# Allegro board ETHIIc.brd
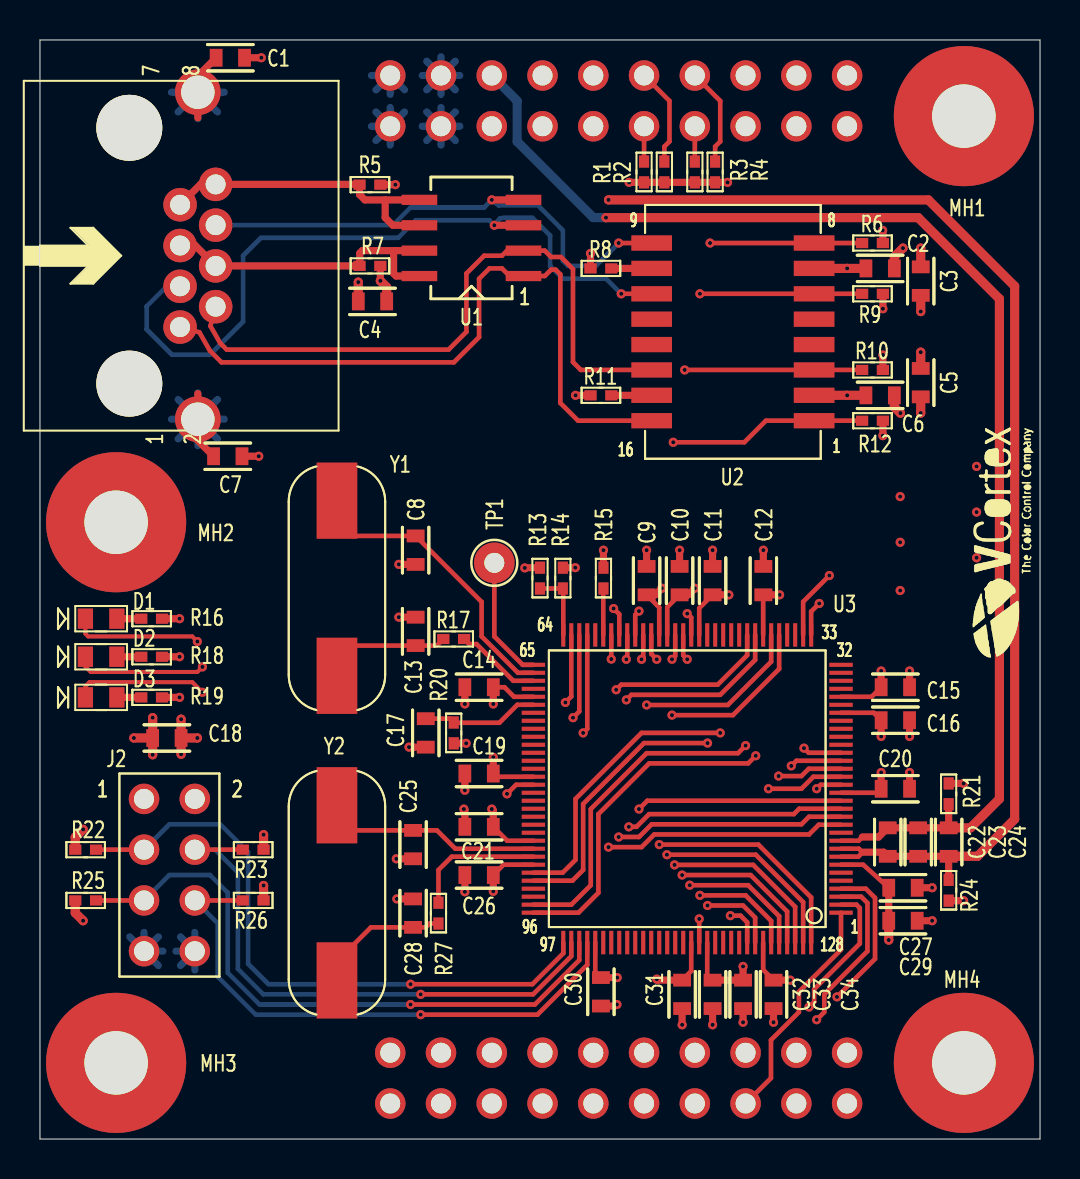
[diagram p0: board, top side]
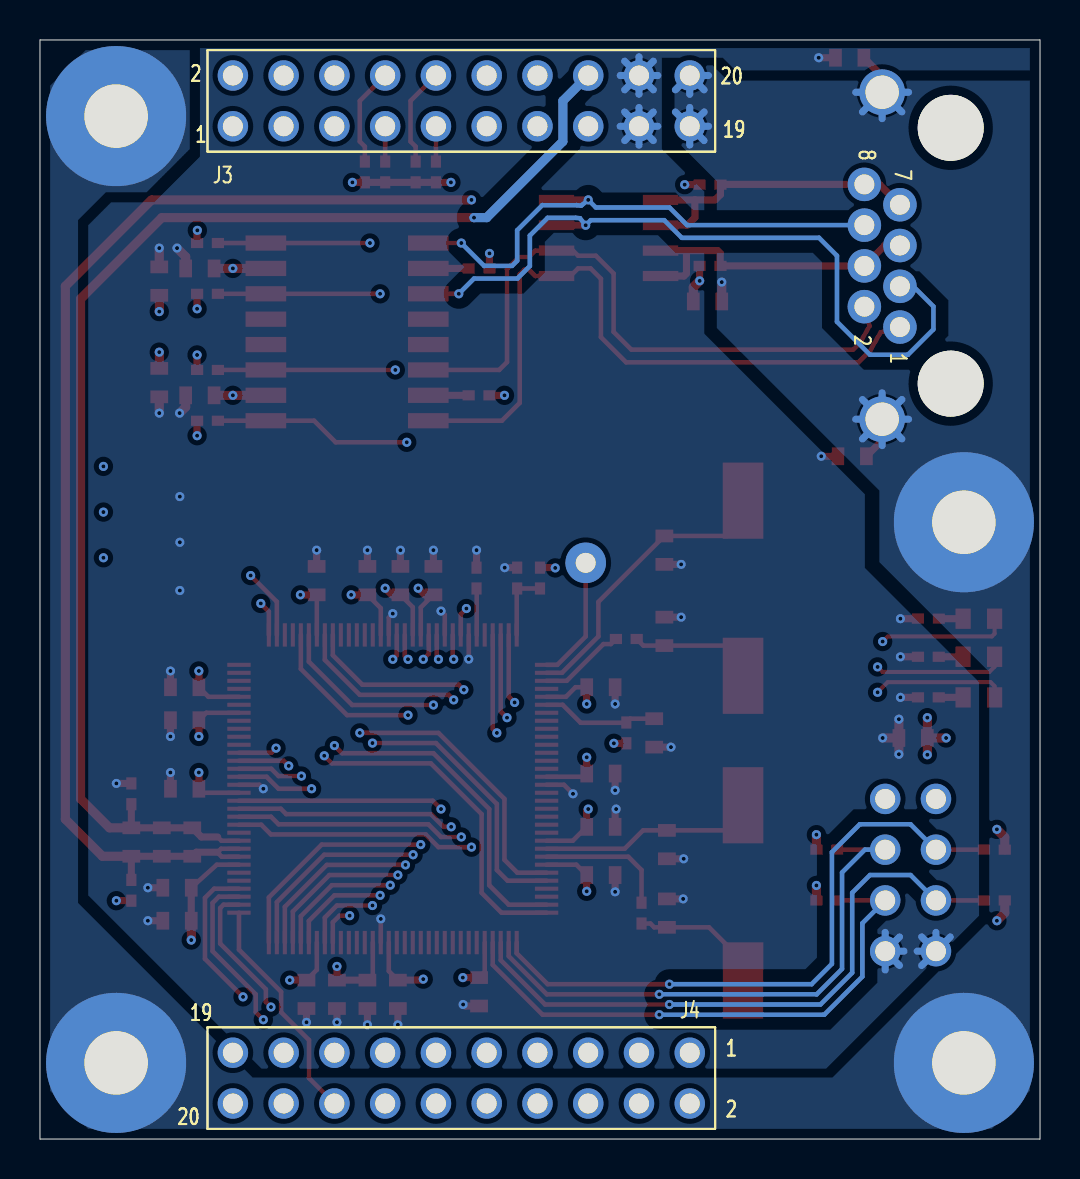
[diagram p1: board, bottom side, seen from below]

Outline 50.04 x 54.99 mm; copper layers: TOP, SIG1, SIG2, BOTTOM. Coordinates in mm from the lower left corner of the outline.
Outline path: 0,54.99 0,0 50.04,0 50.04,54.99 0,54.99

## Design rules (mm)
net group 100R_DIFF: nets RX+ RX- TX+ TX-

## Placement (name value [footprint] x y rotation side)
C1  0.1uF  [0603]  9.53 54.1 180 top
C2  0.1uF  [0603]  42.04 43.56 180 top
C3  0.1uF  [0603]  44.07 42.93 270 top
C4  1000pF  [0603]  16.64 41.91 180 top
C5  0.1uF  [0603]  44.07 37.85 90 top
C6  0.1uF  [0603]  42.04 37.21 180 top
C7  4.7uF  [0603]  9.4 34.16 180 top
C8  12pF  [0603]  18.8 29.46 90 top
C9  0.1uF  [0603]  30.35 27.94 270 top
C10  0.1uF  [0603]  32 27.94 270 top
C11  0.1uF  [0603]  33.66 27.94 270 top
C12  0.1uF  [0603]  36.2 27.94 270 top
C13  12pF  [0603]  18.8 25.4 270 top
C14  0.1uF  [0603]  21.97 22.61 0 top
C15  4.7uF  [0603]  42.8 22.61 180 top
C16  0.1uF  [0603]  42.8 20.95 180 top
C17  4.7uF  [0603]  19.3 20.32 90 top
C18  0.1uF  [0603]  6.35 20.07 180 top
C19  0.1uF  [0603]  21.97 18.29 0 top
C20  0.1uF  [0603]  42.8 17.53 180 top
C21  0.1uF  [0603]  21.97 15.62 0 top
C22  4.7uF  [0603]  42.42 14.86 270 top
C23  0.1uF  [0603]  43.94 14.86 270 top
C24  0.1uF  [0603]  45.47 14.86 270 top
C25  12pF  [0603]  18.67 14.73 90 top
C26  0.1uF  [0603]  21.97 13.21 0 top
C27  0.1uF  [0603]  43.18 12.57 180 top
C28  12pF  [0603]  18.67 11.3 270 top
C29  0.1uF  [0603]  43.18 10.92 180 top
C30  0.1uF  [0603]  28.07 7.37 90 top
C31  0.1uF  [0603]  32.13 7.24 90 top
C32  0.1uF  [0603]  33.66 7.24 90 top
C33  4.7uF  [0603]  35.18 7.24 90 top
C34  0.1uF  [0603]  36.7 7.24 90 top
D1  598-8070-107F  [LED0603]  3.06 26.04 0 top
D2  598-8070-107F  [LED0603]  3.06 24.13 0 top
D3  598-8070-107F  [LED0603]  3.06 22.1 0 top
J1  ETH  [1-406541-5]  7.9 44.2 270 top
J2  CON8  [HEADER_TH_2X4]  6.48 13.21 0 top
J3  CON20  [HEADER_TH_2X10]  28.96 51.94 90 bottom
J4  CON20  [HEADER_TH_2X10]  28.96 3.05 270 bottom
MH1  Hole  [PMH276D126]  46.23 51.18 0 top
MH2  Hole  [PMH276D126]  3.81 30.86 0 top
MH3  Hole  [PMH276D126]  3.81 3.81 0 top
MH4  Hole  [PMH276D126]  46.23 3.81 0 top
NOREF  -  []  0 54.99 0 top
NOREF#2  -  []  37.85 1.78 90 top
NOREF#3  -  []  17.53 50.67 90 top
NOREF#4  -  []  17.53 53.21 0 top
NOREF#5  -  []  52.43 23.59 90 top
NOREF#6  -  []  0 0 0 top
NOREF#7  -  []  0 0 0 top
NOREF#8  -  []  0 0 90 top
NOREF#9  -  []  7.9 36.02 90 top
NOREF#10  -  []  4.47 37.8 90 top
NOREF#11  -  []  46.23 51.18 90 top
NOREF#12  -  []  40.39 50.67 0 top
NOREF#13  -  []  50.04 0 90 top
NOREF#14  -  []  40.39 4.32 90 top
NOREF#15  -  []  7.9 36.02 90 top
NOREF#16  -  []  4.47 37.8 90 top
NOREF#17  -  []  52.43 23.59 90 top
NOREF#18  -  []  -111.89 -133.35 0 top
NOREF#19  -  []  0 0 0 top
NOREF#20  -  []  0 0 90 top
NOREF#21  -  []  7.01 42.67 0 top
NOREF#22  -  []  0 0 0 top
NOREF#23  -  []  0 0 90 top
NOREF#24  -  []  17.53 1.78 0 top
NOREF#25  -  []  50.04 0 90 top
NOREF#26  -  []  207.01 8 0 top
NOREF#27  -  []  7.01 46.75 90 top
R1  10k  [0402]  30.23 48.39 90 top
R2  10k  [0402]  31.24 48.39 90 top
R3  10k  [0402]  32.77 48.39 90 top
R4  10k  [0402]  33.78 48.39 90 top
R5  75R  [0402]  16.51 47.75 180 top
R6  49.9R  [0402]  41.66 44.83 0 top
R7  75R  [0402]  16.51 43.69 180 top
R8  75R  [0402]  28.07 43.56 0 top
R9  49.9R  [0402]  41.66 42.29 0 top
R10  49.9R  [0402]  41.66 38.48 0 top
R11  75R  [0402]  28.07 37.21 0 top
R12  49.9R  [0402]  41.66 35.94 0 top
R13  10k  [0402]  25.02 28.07 270 top
R14  10k  [0402]  26.16 28.07 90 top
R15  4.87K  [0402]  28.19 28.07 90 top
R16  75R  [0402]  5.59 26.04 0 top
R17  2k  [0402]  20.7 25.02 0 top
R18  75R  [0402]  5.59 24.13 0 top
R19  75R  [0402]  5.59 22.1 0 top
R20  10k  [0402]  20.7 20.32 90 top
R21  10k  [0402]  45.47 17.27 90 top
R22  10k  [0402]  2.29 14.48 0 top
R23  10k  [0402]  10.67 14.48 180 top
R24  10k  [0402]  45.47 12.45 270 top
R25  10k  [0402]  2.29 11.94 0 top
R26  10k  [0402]  10.67 11.94 180 top
R27  2k  [0402]  19.94 11.3 90 top
TP1  TEST POINT  [KEYSTONE-5000]  22.73 28.83 270 top
U1  SLVU2.8-4A1  [SOIC-8]  21.59 45.09 90 top
U2  -  [HX1198FNL]  34.67 40.39 180 top
U3  TM4C1294NCPDTI  [TQFP-128]  32.38 17.53 90 top
Y1  ATS160SM-1  [ATS]  14.86 27.56 270 top
Y2  ATS250SM-1  [ATS]  14.86 12.32 270 top

## Library data of the parts
C1-C6 C8-C14 C16 C18-C21 C23-C32 C34 = C
C7 C15 C17 C22 C33 = C_1
D1-D3 = d_5
J1 = CON8_1
J2 = CON8_2
J3 J4 = CON20_0
MH1-MH4 = FIDUCIAL_1
R1-R27 = R
TP1 = TEST POINT_2
U1 = SLVU2.8-4A1
U2 = HX1198FNL
U3 = TM4C1294NCPDTI
Y1 Y2 = ATS250BSM-1

## Footprints (pads in the part's own frame, mm; a bottom-side part is the same pattern mirrored in y, then rotated)
1-406541-5
  round 3.299 hole 3.3 unplated: (-6.4,-3.43) (6.4,-3.43)
  round 1.676 hole 1: 1(3.57,-0.89) 2(2.55,0.89) 3(1.53,-0.89) 4(0.51,0.89) 5(-0.51,-0.89) 6(-1.53,0.89) 7(-2.55,-0.89) 8(-3.57,0.89)
  round 2.286 hole 1.67: 9(-8.18,0) 10(8.18,0)
0402
  rect 0.61x0.508 smd: 1(-0.521,0) 2(0.521,0)
0603
  rect 0.635x0.889 smd: 1(-0.711,0) 2(0.711,0)
ATS
  rect 3.81x2.032 smd: 1(-4.381,0) 2(4.381,0)
HEADER_TH_2X4
  round 1.524 hole 1: 1(-1.27,3.81) 2(1.27,3.81) 3(-1.27,1.27) 4(1.27,1.27) 5(-1.27,-1.27) 6(1.27,-1.27) 7(-1.27,-3.81) 8(1.27,-3.81)
HEADER_TH_2X10
  round 1.524 hole 1: 1(-1.27,11.43) 2(1.27,11.43) 3(-1.27,8.89) 4(1.27,8.89) 5(-1.27,6.35) 6(1.27,6.35) 7(-1.27,3.81) 8(1.27,3.81) 9(-1.27,1.27) 10(1.27,1.27) 11(-1.27,-1.27) 12(1.27,-1.27) 13(-1.27,-3.81) 14(1.27,-3.81) 15(-1.27,-6.35) 16(1.27,-6.35) 17(-1.27,-8.89) 18(1.27,-8.89) 19(-1.27,-11.43) 20(1.27,-11.43)
HX1198FNL
  rect 2.032x0.762 smd: 1(-4.064,4.445) 2(-4.064,3.175) 3(-4.064,1.905) 4(-4.064,0.635) 5(-4.064,-0.635) 6(-4.064,-1.905) 7(-4.064,-3.175) 8(-4.064,-4.445) 9(4.064,-4.445) 10(4.064,-3.175) 11(4.064,-1.905) 12(4.064,-0.635) 13(4.064,0.635) 14(4.064,1.905) 15(4.064,3.175) 16(4.064,4.445)
KEYSTONE-5000
  round 2.032 hole 1: 1(0,0)
LED0603
  rect 0.762x1.016 smd: 1(-0.787,0) 2(0.787,0)
PMH276D126
  round 7.01 hole 3.175: 1(0,0)
SOIC-8
  rect 0.508x1.778 smd: 1(-1.905,-2.603) 2(-0.635,-2.603) 3(0.635,-2.603) 4(1.905,-2.603) 5(1.905,2.603) 6(0.635,2.603) 7(-0.635,2.603) 8(-1.905,2.603)
TQFP-128
  rect 0.203x1.168 smd: 1(-6.201,-7.696) 2(-5.801,-7.696) 3(-5.401,-7.696) 4(-5.001,-7.696) 5(-4.601,-7.696) 6(-4.201,-7.696) 7(-3.801,-7.696) 8(-3.401,-7.696) 9(-3.001,-7.696) 10(-2.6,-7.696) 11(-2.2,-7.696) 12(-1.8,-7.696) 13(-1.4,-7.696) 14(-1,-7.696) 15(-0.6,-7.696) 16(-0.2,-7.696) 17(0.2,-7.696) 18(0.6,-7.696) 19(1,-7.696) 20(1.4,-7.696) 21(1.8,-7.696) 22(2.2,-7.696) 23(2.6,-7.696) 24(3.001,-7.696) 25(3.401,-7.696) 26(3.801,-7.696) 27(4.201,-7.696) 28(4.601,-7.696) 29(5.001,-7.696) 30(5.401,-7.696) 31(5.801,-7.696) 32(6.201,-7.696) 65(6.201,7.696) 66(5.801,7.696) 67(5.401,7.696) 68(5.001,7.696) 69(4.601,7.696) 70(4.201,7.696) 71(3.801,7.696) 72(3.401,7.696) 73(3.001,7.696) 74(2.6,7.696) 75(2.2,7.696) 76(1.8,7.696) 77(1.4,7.696) 78(1,7.696) 79(0.6,7.696) 80(0.2,7.696) 81(-0.2,7.696) 82(-0.6,7.696) 83(-1,7.696) 84(-1.4,7.696) 85(-1.8,7.696) 86(-2.2,7.696) 87(-2.6,7.696) 88(-3.001,7.696) 89(-3.401,7.696) 90(-3.801,7.696) 91(-4.201,7.696) 92(-4.601,7.696) 93(-5.001,7.696) 94(-5.401,7.696) 95(-5.801,7.696) 96(-6.201,7.696)
  rect 1.168x0.203 smd: 33(7.696,-6.201) 34(7.696,-5.801) 35(7.696,-5.401) 36(7.696,-5.001) 37(7.696,-4.601) 38(7.696,-4.201) 39(7.696,-3.801) 40(7.696,-3.401) 41(7.696,-3.001) 42(7.696,-2.6) 43(7.696,-2.2) 44(7.696,-1.8) 45(7.696,-1.4) 46(7.696,-1) 47(7.696,-0.6) 48(7.696,-0.2) 49(7.696,0.2) 50(7.696,0.6) 51(7.696,1) 52(7.696,1.4) 53(7.696,1.8) 54(7.696,2.2) 55(7.696,2.6) 56(7.696,3.001) 57(7.696,3.401) 58(7.696,3.801) 59(7.696,4.201) 60(7.696,4.601) 61(7.696,5.001) 62(7.696,5.401) 63(7.696,5.801) 64(7.696,6.201) 97(-7.696,6.201) 98(-7.696,5.801) 99(-7.696,5.401) 100(-7.696,5.001) 101(-7.696,4.601) 102(-7.696,4.201) 103(-7.696,3.801) 104(-7.696,3.401) 105(-7.696,3.001) 106(-7.696,2.6) 107(-7.696,2.2) 108(-7.696,1.8) 109(-7.696,1.4) 110(-7.696,1) 111(-7.696,0.6) 112(-7.696,0.2) 113(-7.696,-0.2) 114(-7.696,-0.6) 115(-7.696,-1) 116(-7.696,-1.4) 117(-7.696,-1.8) 118(-7.696,-2.2) 119(-7.696,-2.6) 120(-7.696,-3.001) 121(-7.696,-3.401) 122(-7.696,-3.801) 123(-7.696,-4.201) 124(-7.696,-4.601) 125(-7.696,-5.001) 126(-7.696,-5.401) 127(-7.696,-5.801) 128(-7.696,-6.201)

## Nets
3.3V: C2.2 C3.2 C5.2 C6.2 C9.2 C10.2 C11.2 C12.2 C14.2 C15.2 C16.2 C18.2 C19.2 C20.2 C26.2 C27.2 C29.2 C30.2 C31.2 C34.2 J2.1 J2.2 J3.1 J3.2 R1.1 R2.1 R3.1 R4.1 R6.2 R9.2 R10.2 R12.2 R13.1 R20.1 R22.1 R23.1 R24.2 R25.1 R26.1 U2.2 U2.7 U3.7(VDD1) U3.16(VDD2) U3.26(VDD3) U3.28(VDD4) U3.39(VDD5) U3.47(VDD6) U3.51(VDD7) U3.52(VDD8) U3.69(VDD9) U3.79(VDD10) U3.90(VDD11) U3.101(VDD12) U3.113(VDD13) U3.122(VDD14)
3.3VA: C22.2 C23.2 C24.2 J3.15 R24.1 U3.8(VDDA) U3.9(VREFA+)
3.3VB: U3.68(VBAT)
GND: C1.1 C2.1 C3.1 C5.1 C6.1 C7.1 C8.1 C9.1 C10.1 C11.1 C12.1 C13.1 C14.1 C15.1 C16.1 C17.1 C18.1 C19.1 C20.1 C21.1 C25.1 C26.1 C27.1 C28.1 C29.1 C30.1 C31.1 C32.1 C33.1 C34.1 J2.7 J2.8 J3.17 J3.18 R14.2 R15.2 R16.2 R18.2 R19.2 R21.2 U3.17(GND1) U3.48(GND2) U3.55(GND3) U3.58(GND4) U3.80(GND5) U3.114(GND6)
GND_EARTH: C1.2 C4.2 C7.2 J1.9(CHASSIS2) J1.10(CHASSIS1) J3.19 J3.20 MH1.1 MH2.1 MH3.1 MH4.1
GNDA: C22.1 C23.1 C24.1 J3.16 R21.1 U3.10(GNDA)
VDDC: C21.2 C32.2 C33.2 U3.87(VDDC1) U3.115(VDDC2)
AIN0: J4.1 U3.12(PE3/AIN0/U1DTR)
AIN1: J4.2 U3.13(PE2/AIN1/U1DCD)
AIN2: J4.3 U3.14(PE1/AIN2/U1DSR)
AIN3: J4.4 U3.15(PE0/AIN3/U1RTS)
AIN4: J4.5 U3.128(PD7/AIN4/NMI/SSI2XDAT2/T4CCP1/U)
AIN5: J4.6 U3.127(PD6/AIN5/SSI2XDAT3/T4CCP0/U2RTS)
AIN6: J4.7 U3.126(PD5/AIN6/SSI1XDAT3/T3CCP1/U2TX)
AIN7: J4.8 U3.125(PD4/AIN7/SSI1XDAT2/T3CCO0/U2RX)
AIN8: J4.9 U3.124(PE5/AIN8/SSI1XDAT1)
AIN9: J4.10 U3.123(PE4/AIN9/SSI1XDAT0/U1RI)
AIN10: J4.11 U3.121(PB4/AIN10/I2C5SCL/SSI1FSS/U0CTS)
AIN11: J4.12 U3.120(PB5/AIN11/I2C5SDA/SSI1CLK/U0RTS)
AIN12: J4.13 U3.4(PD3/AIN12/I2C8SDA/SSI2CLK/T1CCP)
AIN13: J4.14 U3.3(PD2/AIN13/C2O/I2C8SCL/SSI2SCL/T)
AIN14: J4.15 U3.2(PD1/AIN14/C1O/I2C7SDA/SSI2XDAT0)
AIN15: J4.16 U3.1(PD0/AIN15/C0O/I2C7SCL/SSI2XDAT1)
AIN16: J4.17 U3.18(PK0/AIN16/EPI0S0/U4RX)
AIN17: J4.18 U3.19(PK1/AIN17/EPIOS1/U4TX)
AIN18: J4.19 U3.20(PK2/AIN18/EPI0S2/U4RTS)
AIN19: J4.20 U3.21(PK3/AIN19/EPI0S3/U4CTS)
CAN0RX_UART0RX: J3.3 U3.33(PA0/CAN0RX/I2C9SCL/T0CCP0/U0RX)
CAN0TX_UART0TX: J3.4 U3.34(PA1/CAN0TX/I2C9SDA/T0CCP1/U0TX)
CAN1RX_UART1RX: J3.5 U3.95(PB0/CAN1RX/I2C5SCL/T4CCP0/U1RX/)
CAN1TX_UART1TX: J3.6 U3.96(PB1/CAN1TX/I2C5SDA/T4CCP1/U1TX/)
EN0RXIN: R6.1 U2.8 U3.53(EN0RXIN)
EN0RXIP: R9.1 U2.6 U3.54(EN0RXIP)
EN0TXON: R10.1 U2.3 U3.56(EN0TXON)
EN0TXOP: R12.1 U2.1 U3.57(EN0TXOP)
I2C0SCL: J3.8 R4.2 U3.91(PB2/EPI0S27/I2C0SCL/T5CCP0)
I2C0SDA: J3.7 R3.2 U3.92(PB3/EPI0S28/I2C0SDA/T5CCP1)
I2C1SCL: J3.10 R2.2 U3.49(PG0/EN0PPS/EPI0S11/I2C1SCL/M0PW)
I2C1SDA: J3.9 R1.2 U3.50(PG1/EPI0S10/I2C1SDA0/M0PWM5)
RX+: J1.3(RX+) U1.3 U2.11
RX-: J1.6(RX-) U1.4 U2.9
TCK: J2.6 R26.2 U3.100(PC0/SWCLK/TCK)
TDI: J2.4 R23.2 U3.98(PC2/TDI)
TDO: J2.3 R22.2 U3.97(PC3/SWO/TDO)
TERM1A: J1.4(TERM1A) J1.5(TERM1B) R7.2 U1.7 U1.8
TERM2A: J1.7(TERM2A) J1.8(TERM2B) R5.2 U1.5 U1.6
TMS: J2.5 R25.2 U3.99(PC1/SWDIO/TMS)
TX+: J1.1(TX+) U1.1 U2.16
TX-: J1.2(TX-) U1.2 U2.14
UART2RX: J3.13 U3.40(PA6/EPI0S8/I2C6SCL/SSI0XDAT2/T3)
UART2TX: J3.14 U3.41(PA7/EPI0S9/I2C6SDA/SSI0XDAT3/T3)
UART3RX: J3.11 U3.37(PA4/I2C7SCL/SSI0XDAT0/T2CCP0/U3)
UART3TX: J3.12 U3.38(PA5/I2C7SDA/SSI0XDAT1/T2CCP1/U3)
N129505: C17.2 R20.2 U3.70(R\S\T\)
N130186: R27.2 U3.89(OSC1)
N130446: C28.2 R27.1 Y2.2
N132048: C8.2 U3.66(XOSC0) Y1.1
N132071: R17.2 U3.67(XOSC1)
N132102: C25.2 U3.88(OSC0) Y2.1
N133314: C13.2 R17.1 Y1.2
N134047: TP1.1 U3.65(H\I\B\)
N134520: R13.2 R14.1 U3.64(W\A\K\E\)
N138408: R8.2 U2.10
N138412: R11.2 U2.15
N138416: C4.1 R5.1 R7.1 R8.1 R11.1
N141220: R15.1 U3.59(RBIAS)
N141456: D1.2(CATHODE) R16.1
N141460: D2.2(CATHODE) R18.1
N141464: D3.2(CATHODE) R19.1
N141696: D3.1(ANODE) U3.61(PK6/EN0LED1/EPI0S25/I2C4SCL/M0F)
N141703: D2.1(ANODE) U3.62(PK5/EN0LED2/EPI0S31/I2C3SDA/M0P)
N141710: D1.1(ANODE) U3.63(PK4/EN0LED0/EPI0S32/I2C3SCL/M0P)

Pads without a net: U2 4 5 12 13; U3 5 6 11 22 23 24 25 27 29 30 31 32 35 36 42 43 44 45 46 60 71 72 73 74 75 76 77 78 81 82 83 84 85 86 93 94 102 103 104 105 106 107 108 109 110 111 112 116 117 118 119

## Via types
v1: diameter 0.457, hole 0.203, TOP to BOTTOM, 146 vias

## Routing (per net, layer and track width the routed paths; a pad name or vN(x,y) marks a point on that pad's centre or on a via; arc(x,y) is an arc through that point)
3.3V: length 103.2
  TOP w0.229: U3.16 41.89,17.33 C20.2 ; C12.2 36.19,27.22 U3.39 ; C11.2 32.99,26.56 U3.47 ; C16.2 41.72,21.33 U3.26 ; C9.2 30.98,26.6 U3.52 ; C34.2 36.19,8.47 U3.122 ; C31.2 32.59,8.4 U3.113 ; C19.2 22.84,18.13 U3.79 ; U3.69 23.72,22.13 23.24,22.61 C14.2 ; C26.2 23.2,13.73 U3.90 ; C10.2 31.38,26.61 U3.51 ; U3.7 41.19,13.73 C27.2 ; U3.101 27.78,8.36 C30.2 ; U3.28 41.61,22.13 C15.2
  TOP w0.356: R6.2 42.18,45.45 v1(42.16,45.47) ; R9.2 v1(42.18,41.54) ; C9.2 30.78,27.23 v1(31.11,27.56) ; C27.2 C29.2 ; C26.2 v1(22.68,12.4) ; C11.2 v1(34.47,27.23) ; v1(24.26,28.57) 24.27,28.59 R13.1 ; C15.2 v1(42.09,23.42) ; C14.2 v1(22.68,21.77) ; C20.2 v1(42.09,18.34) ; C30.2 v1(28.88,8.08) ; R24.2 v1(46.22,11.93) ; C19.2 v1(22.68,19.1) ; C10.2 32.44,27.23 v1(32.77,27.56) ; C12.2 v1(37.01,27.23) ; C16.2 v1(42.09,20.14) ; v1(29.48,47.87) R1.1 R2.1 R3.1 R4.1 v1(34.4,47.87) ; C31.2 30.91,7.95 v1(30.86,8) ; R20.1 v1(21.32,19.8) ; C34.2 v1(37.54,7.95) ; R10.2 v1(42.18,39.23) ; R12.2 v1(42.18,35.19)
  TOP w0.457: R25.1 1.77,11.32 v1(2.16,10.92) ; R26.1 v1(11.19,12.69) ; C18.2 v1(4.7,20.07) ; C18.2 v1(5.64,21.08) ; C18.2 v1(5.64,19.23) ; U2.2 v1(40.39,37.21) C6.2 ; U2.7 v1(40.39,43.56) C2.2 ; v1(2.16,15.49) 1.77,15.1 R22.1 ; C29.2 v1(42.47,9.96) ; C5.2 v1(44.07,39.37) ; C3.2 v1(44.07,41.4) ; R23.1 v1(11.19,15.23)
  SIG1 w0.356: 4.4,16.21 J2.1 ; J2.1 5.21,18.09 ; J2.1 4.4,17.82 ; J2.1 6.01,17.82 ; J2.1 6.01,16.21 ; J2.1 4.14,17.02 ; J2.1 5.21,15.95 ; J2.1 6.27,17.02 ; J3.2 41.45,53.21 ; J3.2 41.19,52.41 ; J3.2 41.19,54.02 ; J3.2 40.39,52.15 ; J3.2 39.58,52.41 ; J3.2 39.58,54.02 ; J3.2 40.39,54.28 ; J3.2 39.32,53.21 ; 39.58,51.48 J3.1 ; J3.1 41.45,50.67 ; J3.1 41.19,51.48 ; J3.1 39.32,50.67 ; J3.1 39.58,49.87 ; J3.1 40.39,51.74 ; J3.1 40.39,49.61 ; J3.1 41.19,49.87 ; 6.94,17.82 J2.2 ; J2.2 8.55,17.82 ; J2.2 7.75,18.09 ; J2.2 7.75,15.95 ; J2.2 6.94,16.21 ; J2.2 6.68,17.02 ; J2.2 8.55,16.21 ; J2.2 8.81,17.02
  vias: v1(46.86,33.66) v1(46.86,31.37) v1(46.86,29.08)
3.3VA: length 68.1
  TOP w0.229: U3.9 40.97,14.53 41.15,14.35 41.15,14.33 40.94,14.13 U3.8
  TOP w0.356: R24.1 C24.2 C23.2 C22.2 42.21,14.35 41.15,14.35
  TOP w0.457: v1(28.45,46.99) 44.45,46.99 48.77,42.67 48.77,16 46.91,14.15 C24.2
  SIG1 w0.457: J3.15 26.29,46.99 v1(28.45,46.99)
GND: length 100
  TOP w0.229: v1(38.86,17.53) 39.06,17.73 U3.17 ; U3.114 v1(32.99,11.01) ; v1(29.97,26.42) 29.78,26.23 U3.55 ; v1(23.37,17.27) 23.82,17.73 U3.80 ; U3.48 32.59,26.09 v1(32.38,26.29) ; U3.58 v1(28.58,24.01)
  TOP w0.356: C10.1 v1(32,29.46) ; C34.1 v1(36.7,5.84) ; C32.1 v1(33.66,5.71) ; C28.1 v1(17.86,12.01) ; v1(21.21,16.51) 21.26,16.46 C21.1 ; C12.1 v1(36.2,29.46) ; C29.1 v1(44.64,10.92) ; C15.1 v1(43.51,23.42) ; C31.1 v1(32.13,5.71) ; C33.1 v1(35.18,5.84) ; R15.2 v1(28.19,29.46) ; C11.1 v1(33.66,29.46) ; C27.1 v1(44.64,12.57) ; C9.1 v1(30.35,29.46) ; R18.2 v1(6.99,24.13) ; R14.2 v1(26.78,28.59) ; C8.1 v1(17.96,28.75) ; C30.1 28.75,6.65 28.83,6.73 v1(28.87,6.73) ; R16.2 v1(6.99,26.04) ; C7.1 v1(10.95,34.16) ; C16.1 v1(43.51,20.14) ; R21.2 v1(46.22,17.79) ; C1.1 v1(11.07,54.1) ; R19.2 v1(6.99,22.1) ; C14.1 v1(21.26,21.77) ; C17.1 v1(18.47,19.61) ; C25.1 v1(17.83,14.02) ; C26.1 v1(21.26,12.37) ; C20.1 v1(43.51,18.34) ; C13.1 v1(17.96,26.11) ; C19.1 v1(21.26,17.45)
  TOP w0.457: C2.1 42.75,44.15 v1(43.18,44.58) ; C18.1 v1(7.06,21.01) ; C18.1 v1(7.87,20.07) ; C18.1 v1(7.06,19.25) ; C6.1 42.75,36.63 v1(43.05,36.32) ; C5.1 v1(44.07,36.32) ; C3.1 v1(44.07,44.58)
  SIG2 w0.356: J3.17 20.87,51.48 ; J3.17 21.13,50.67 ; J3.17 19,50.67 ; J3.17 19.26,51.48 ; J3.17 20.07,49.61 ; J3.17 19.26,49.87 ; J3.17 20.07,51.74 ; J3.17 20.87,49.87 ; J2.8 8.55,10.2 ; J2.8 8.55,8.59 ; J2.8 6.94,10.2 ; J2.8 8.81,9.4 ; J2.8 7.75,10.47 ; J2.8 6.94,8.59 ; J2.8 6.68,9.4 ; J2.8 7.75,8.33 ; J2.7 6.01,8.59 ; J2.7 4.4,8.59 ; J2.7 4.14,9.4 ; J2.7 6.01,10.2 ; J2.7 4.4,10.2 ; J2.7 5.21,10.47 ; J2.7 6.27,9.4 ; J2.7 5.21,8.33 ; 19.26,52.41 J3.18 ; J3.18 20.87,54.02 ; J3.18 19,53.21 ; J3.18 19.26,54.02 ; J3.18 20.07,52.15 ; J3.18 20.07,54.28 ; J3.18 20.87,52.41 ; J3.18 21.13,53.21
  BOTTOM w0.356: J3.18 21.01,53.21 ; J3.18 19.35,52.5 ; J3.18 20.07,54.15 ; J3.18 20.07,52.27 ; J3.18 20.78,52.5 ; J3.18 19.35,53.93 ; J3.18 20.78,53.93 ; J3.18 19.13,53.21 ; J3.17 20.78,51.39 ; J3.17 19.13,50.67 ; J3.17 19.35,49.96 ; J3.17 20.07,51.61 ; J3.17 19.35,51.39 ; J3.17 20.78,49.96 ; J3.17 20.07,49.73 ; J3.17 21.01,50.67 ; J2.8 7.75,10.34 ; J2.8 7.03,8.68 ; J2.8 7.03,10.11 ; J2.8 7.75,8.46 ; J2.8 6.81,9.4 ; J2.7 6.15,9.4 ; J2.7 5.21,10.34 ; J2.7 5.92,10.11 ; J2.7 4.49,10.11 ; J2.7 5.92,8.68
  vias: v1(43.04,32.14) v1(43.04,29.86) v1(43.04,27.44)
GND_EARTH: length 35.2
  TOP w0.356: 7.9,51.1 J1.9 7.9,53.19 C1.2 ; 7.9,37.3 J1.10 7.9,34.95 C7.2
  TOP w0.457: C4.2 v1(15.93,42.88)
  BOTTOM w0.356: J1.9 8.88,51.39 ; J1.9 9.22,52.38 ; J1.9 6.91,51.39 ; J1.9 6.58,52.38 ; J1.9 7.9,51.05 ; J3.19 18.24,51.39 ; J3.19 16.81,51.39 ; J3.19 17.53,51.61 ; J3.19 17.53,49.73 ; J3.19 16.59,50.67 ; J3.19 16.81,49.96 ; 6.58,36.02 J1.10 ; J1.10 8.88,37 ; J1.10 7.9,34.69 ; J1.10 6.91,37 ; J1.10 7.9,37.34 ; J1.10 9.22,36.02 ; J1.10 8.88,35.03 ; J1.10 6.91,35.03 ; 17.53,52.27 J3.20 ; J3.20 16.59,53.21 ; J3.20 18.24,52.5 ; J3.20 16.81,52.5
GNDA: length 66.2
  TOP w0.229: U3.10 40.96,14.93 41.15,15.11
  TOP w0.356: 41.15,15.11 41.96,15.11 C22.1 C23.1 C24.1 R21.1
  TOP w0.457: v1(28.32,46.1) 43.94,46.1 48.01,42.04 48.01,17.02 46.56,15.57 C24.1
  BOTTOM w0.457: v1(28.32,46.1) 27.69,46.1 23.88,49.91 23.88,51.94 J3.16
VDDC: length 7.4
  TOP w0.229: C21.2 23.38,14.93 U3.87 ; C32.2 33.39,8.22 U3.115
  TOP w0.356: v1(35.18,8.64) C33.2 C32.2 ; v1(22.61,16.51) 22.68,16.43 C21.2
AIN0: length 27.3
  TOP w0.229: v1(28.45,14.61) 30.1,14.61 30.73,15.24 38.48,15.24 38.97,15.73 U3.12
  SIG2 w0.203: J4.1 17.55,4.29 17.84,4.29 28.15,14.61 v1(28.45,14.61)
AIN1: length 29.9
  TOP w0.229: U3.13 38.48,16.13 38.1,15.75 30.61,15.75 29.97,15.11 v1(28.96,15.11)
  SIG2 w0.203: v1(28.96,15.11) 28.96,14.39 28.53,13.97 28.07,13.97 19,4.9 18.8,4.7 18.8,3.05 J4.2
AIN2: length 26.2
  TOP w0.229: v1(29.46,15.62) 29.84,15.62 30.48,16.26 37.72,16.26 37.99,16.53 U3.14
  SIG2 w0.203: J4.3 20.07,4.97 29.46,14.36 v1(29.46,15.62)
AIN3: length 29.1
  TOP w0.229: U3.15 30.39,16.93 v1(29.97,16.51)
  SIG2 w0.203: J4.4 21.34,3.05 21.34,5.7 29.97,14.33 v1(29.97,16.51)
AIN4: length 24.8
  TOP w0.229: U3.128 38.59,12.09 35.94,14.73 v1(30.99,14.73)
  SIG2 w0.203: v1(30.99,14.73) 22.61,6.35 J4.5
AIN5: length 25.9
  TOP w0.229: v1(31.37,14.22) 35.81,14.22 38.19,11.85 U3.127
  SIG2 w0.203: J4.6 23.88,3.05 23.88,6.73 v1(31.37,14.22)
AIN6: length 20.8
  TOP w0.229: v1(31.75,13.72) 35.69,13.72 37.79,11.62 U3.126
  SIG2 w0.203: v1(31.75,13.72) 25.15,7.11 J4.7
AIN7: length 21.9
  TOP w0.229: U3.125 37.39,11.38 35.56,13.21 v1(32.13,13.21)
  SIG2 w0.203: v1(32.13,13.21) 26.42,7.49 26.42,3.05 J4.8
AIN8: length 16.8
  TOP w0.229: U3.124 36.99,11.15 35.43,12.7 v1(32.51,12.7)
  SIG2 w0.203: J4.9 27.69,7.87 v1(32.51,12.7)
AIN9: length 18
  TOP w0.229: v1(33.02,12.19) 35.31,12.19 36.59,10.91 U3.123
  SIG2 w0.203: v1(33.02,12.19) 32.77,12.19 29.59,9.02 29.59,5.97 28.96,5.33 28.96,3.05 J4.10
AIN10: length 12.8
  TOP w0.229: U3.121 35.79,11.08 35.18,11.68 v1(33.4,11.68)
  SIG2 w0.203: J4.11 30.23,8.97 32.94,11.68 v1(33.4,11.68)
AIN11: length 13.6
  TOP w0.229: v1(34.54,11.18) 35.05,11.18 35.39,10.84 U3.120
  SIG2 w0.203: v1(34.54,11.18) 33.87,11.18 31.62,8.93 31.62,3.17 J4.12
AIN12: length 16.9
  TOP w0.229: v1(39.88,7.11) 41.78,9.02 41.78,12.06 41.32,12.53 U3.4
  SIG2 w0.203: J4.13 32.77,6.1 33.78,7.11 v1(39.88,7.11)
AIN13: length 17.1
  TOP w0.229: v1(38.86,5.97) 38.86,5.97 39.24,6.35 39.24,7.24 41.4,9.4 41.4,11.81 41.09,12.13 U3.3
  SIG2 w0.203: v1(38.86,5.97) 37.59,5.97 36.7,5.08 36.7,3.56 36.2,3.05 34.04,3.05 J4.14
AIN14: length 11.9
  TOP w0.229: U3.2 40.85,11.73 41.02,11.56 41.02,9.78 38.73,7.49 38.73,6.86 v1(38.48,6.6)
  SIG2 w0.203: J4.15 35.81,4.83 35.81,6.1 36.32,6.6 v1(38.48,6.6)
AIN15: length 11.5
  TOP w0.229: U3.1 40.08,9.47 37.97,7.37 37.97,6.35 36.58,4.95 36.58,3.05 J4.16
AIN16: length 19.8
  TOP w0.229: U3.18 38.7,18.13 38.1,17.53 v1(36.45,17.53)
  SIG2 w0.203: J4.17 37.93,4.32 40.39,6.77 40.39,7.87 36.45,11.81 v1(36.45,17.53)
AIN17: length 22.4
  TOP w0.229: U3.19 38.47,18.53 38.1,18.16 v1(36.96,18.16)
  SIG2 w0.203: v1(36.96,18.16) 36.96,11.84 40.77,8.03 40.77,6.48 39.12,4.83 39.12,3.05 J4.18
AIN18: length 18.9
  TOP w0.229: U3.20 37.85,18.93 v1(37.59,18.67)
  SIG2 w0.203: J4.19 40.39,5.33 41.4,6.35 41.4,8 37.59,11.81 v1(37.59,18.67)
AIN19: length 21.8
  TOP w0.229: U3.21 38.46,19.33 v1(38.23,19.56)
  SIG2 w0.203: J4.20 41.78,3.17 41.78,8.16 38.23,11.71 v1(38.23,19.56)
CAN0RX_UART0RX: length 26.1
  TOP w0.229: v1(38.99,26.8) 38.59,26.39 U3.33
  SIG2 w0.203: v1(38.99,26.8) 38.99,48.01 37.85,49.15 J3.3
CAN0TX_UART0TX: length 29.2
  TOP w0.229: U3.34 38.19,26.88 v1(39.5,28.19)
  SIG2 w0.203: J3.4 38.61,52.45 38.61,51.73 39.34,51 39.34,50.24 39.5,50.09 v1(39.5,28.19)
CAN1RX_UART1RX: length 49.3
  TOP w0.229: U3.95 26.58,11.73 27.56,12.7 27.56,16.51 30.35,19.3 34.92,19.3 v1(35.31,19.68)
  SIG2 w0.203: v1(35.31,19.68) 37.97,22.35 37.97,47.24 35.31,49.91 J3.5
CAN1TX_UART1TX: length 53.1
  TOP w0.229: v1(35.81,19.18) 35.43,18.8 30.48,18.8 27.94,16.26 27.94,12.32 26.95,11.33 U3.96
  SIG2 w0.203: J3.6 36.58,51.94 36.58,49.4 38.48,47.5 38.48,21.84 v1(35.81,19.18)
EN0RXIN: length 30.9
  TOP w0.229: R6.1 U2.8 v1(33.53,44.83) ; U3.53 30.58,24.28 v1(30.86,24)
  SIG2 w0.203: v1(30.86,24) 30.86,25.65 31.62,26.42 31.62,27.77 33.15,29.29 33.15,29.67 33.53,30.06 v1(33.53,44.83)
EN0RXIP: length 28.9
  TOP w0.229: R9.1 U2.6 v1(33.02,42.29) ; v1(30.1,24) 30.18,24.09 U3.54
  SIG2 w0.203: v1(30.1,24) 30.1,25.65 30.61,26.16 30.61,28.83 33.02,31.24 v1(33.02,42.29)
EN0TXON: length 25.8
  TOP w0.229: v1(32.26,38.48) U2.3 R10.1 ; U3.56 29.38,24.05 v1(29.34,24)
  SIG2 w0.203: v1(29.34,24) 29.34,29.17 30.14,29.97 32.26,32.09 v1(32.26,38.48)
EN0TXOP: length 20.9
  TOP w0.229: v1(31.69,34.86) 35.24,34.86 36.32,35.94 U2.1 R12.1 ; U3.57 28.98,26.26 v1(28.7,26.54)
  SIG2 w0.203: v1(31.69,34.86) 31.69,32.32 28.7,29.34 v1(28.7,26.54)
I2C0SCL: length 54.6
  TOP w0.229: J3.8 34.04,51.94 34.04,49.91 33.78,49.66 R4.2 ; v1(34.04,20.32) 30.1,20.32 26.8,17.02 26.8,13.97 26.15,13.33 U3.91
  SIG2 w0.203: J3.8 34.04,51.94 34.04,49.91 36.07,47.88 36.07,30.61 36.68,30 36.68,28.93 36.07,28.32 36.07,22.35 v1(34.04,20.32)
I2C0SDA: length 48.2
  TOP w0.229: R3.2 J3.7 ; v1(33.4,19.81) 30.23,19.81 27.18,16.76 27.18,13.46 26.64,12.93 U3.92
  SIG2 w0.203: J3.7 32.77,50.29 35.56,47.5 35.56,22.73 33.4,20.57 v1(33.4,19.81)
I2C1SCL: length 38.6
  TOP w0.229: J3.10 31.5,51.94 31.5,49.91 31.24,49.66 R2.2 ; v1(32.38,24) 32.18,24.2 U3.49
  SIG2 w0.203: J3.10 31.5,51.94 31.5,50.04 35.05,46.48 35.05,26.67 v1(32.38,24)
I2C1SDA: length 32.7
  TOP w0.229: R1.2 J3.9 ; v1(31.62,24) 31.78,24.16 U3.50
  SIG2 w0.203: J3.9 30.23,49.78 34.54,45.47 34.54,28.32 33.96,27.74 33.96,26.85 31.62,24.51 v1(31.62,24)
RX+: length 38
  TOP w0.229: U2.11 v1(29.08,42.29)
  TOP w0.356: v1(22.73,45.72) U1.3
  BOTTOM w0.229: J1.3 6.34,42.67 5.33,41.66 5.33,40.51 6.6,39.24 8.51,39.24 10.16,40.89 10.16,44.2 11.06,45.09 17.92,45.09 18.81,45.97 22.48,45.97 v1(22.73,45.72) 23.02,46.07 23.22,46.09 24.64,46.09 25.53,45.2 25.53,43.68 26.15,43.05 28.32,43.05 v1(29.08,42.29)
RX-: length 26.7
  TOP w0.229: U2.9 v1(28.96,44.83)
  TOP w0.356: v1(22.61,46.99) U1.4
  BOTTOM w0.229: J1.6 17.66,45.73 18.54,46.61 22.23,46.61 v1(22.61,46.99) 22.96,46.7 23.18,46.73 24.9,46.73 26.16,45.47 26.16,43.94 26.42,43.69 27.81,43.69 v1(28.96,44.83)
TCK: length 28.1
  TOP w0.229: v1(19.05,6.22) 24.89,6.22 27.38,8.72 U3.100 ; R26.2 J2.6
  BOTTOM w0.229: v1(19.05,6.22) 10.79,6.22 8.89,8.13 8.89,10.79 J2.6
TDI: length 28.5
  TOP w0.229: R23.2 J2.4 ; U3.98 26.58,9.15 24.67,7.24 v1(19.05,7.24)
  BOTTOM w0.229: J2.4 8.76,14.48 9.91,13.34 9.91,8.51 11.18,7.24 v1(19.05,7.24)
TDO: length 31.7
  TOP w0.229: R22.2 J2.3 ; v1(18.54,7.75) 24.64,7.75 26.18,9.29 U3.97
  BOTTOM w0.229: J2.3 6.48,15.75 9.02,15.75 10.41,14.35 10.41,8.76 11.43,7.75 v1(18.54,7.75)
TERM1A: length 15.6
  TOP w0.356: U1.8 17.82,43.18 17.69,43.31 17.69,44.36 17.78,44.45 ; 17.78,44.45 U1.7 ; 17.78,44.45 16.13,44.45 16,44.32 16,43.7 R7.2 15.99,43.69 J1.4 7.77,44.71 J1.5
TERM2A: length 15.8
  TOP w0.356: U1.6 17.65,45.72 17.27,46.1 17.27,46.99 ; 17.27,46.99 16.26,46.99 15.99,47.26 R5.2 15.98,47.77 J1.8 8.03,47.77 J1.7 ; 17.27,46.99 U1.5
TMS: length 31.5
  TOP w0.229: U3.99 26.98,8.95 24.77,6.73 v1(18.54,6.73) ; R25.2 J2.5
  BOTTOM w0.229: v1(18.54,6.73) 10.99,6.73 9.4,8.32 9.4,12.32 8.51,13.21 6.48,13.21 J2.5
TX+: length 35.3
  TOP w0.229: U2.16 26.92,35.94 26.04,36.83 26.04,43.27 25.8,43.5 25.57,43.5 25.26,43.18 U1.1 23.5,43.18 23.11,43.56 22.49,43.56 21.97,43.04 21.97,40.12 20.71,38.86 9.08,38.86 8.51,39.44 7.98,40.36 J1.1
TX-: length 32.7
  TOP w0.229: U2.14 27.06,38.48 26.67,38.87 26.67,43.53 26.07,44.13 25.57,44.13 25.26,44.45 U1.2 23.37,44.45 23.11,44.2 22.23,44.2 21.34,43.31 21.34,40.39 20.45,39.5 9.35,39.5 9.02,39.83 8.53,40.68 J1.2
UART2RX: length 40.2
  TOP w0.229: U3.40 35.79,23.97 34.04,22.23 29.59,22.23 v1(29.34,21.97)
  SIG2 w0.203: J3.13 24.89,50.42 24.89,24.64 27.56,21.97 v1(29.34,21.97)
UART2TX: length 41.9
  TOP w0.229: v1(28.83,22.48) 29.08,22.73 33.91,22.73 35.39,24.21 U3.41
  SIG2 w0.203: v1(28.83,22.48) 27.81,22.48 25.27,25.02 25.27,49.33 26.19,50.24 26.19,51.1 25.15,52.15 J3.14
UART3RX: length 41
  TOP w0.229: v1(31.62,21.21) 34.67,21.21 36.99,23.52 U3.37
  SIG2 w0.203: v1(31.62,21.21) 29.46,23.37 28.51,23.37 26.04,25.84 26.04,49.01 26.95,49.93 26.95,49.94 J3.11
UART3TX: length 43.3
  TOP w0.229: U3.38 36.59,23.89 34.42,21.72 v1(30.35,21.72)
  SIG2 w0.203: v1(30.35,21.72) 29.08,22.99 28.07,22.99 25.65,25.4 25.65,49.17 26.57,50.08 26.57,52.1 J3.12
N129505: length 5.8
  TOP w0.229: U3.70 23.89,21.73 22.99,20.83 20.71,20.83 R20.2 20.51,21.03 C17.2
N130186: length 6.7
  TOP w0.229: R27.2 19.94,13.46 20.6,14.13 U3.89
N130446: length 6.8
  TOP w0.229: Y2.2 14.86,8.89 16.56,10.59 C28.2 19.3,10.59 19.49,10.78 R27.1
N132048: length 15
  TOP w0.229: U3.66 23.92,23.33 22.1,25.15 22.1,26.87 C8.2 15.67,30.18 14.86,30.99 Y1.1
N132071: length 4.3
  TOP w0.229: U3.67 23.68,22.93 21.84,24.77 21.48,24.77 R17.2
N132102: length 11.1
  TOP w0.229: Y2.1 14.86,16 15.42,15.44 C25.2 19.86,15.44 20.78,14.53 U3.88
N133314: length 6.6
  TOP w0.229: R17.1 19.85,24.69 C13.2 15.54,24.69 14.86,24 Y1.2
N134047: length 6.2
  TOP w0.229: TP1.1 22.73,25.15 24.15,23.73 U3.65
N134520: length 3.5
  TOP w0.229: U3.64 26.18,27.52 R14.1 R13.2
N138408: length 2
  TOP w0.356: U2.10 R8.2
N138412: length 2
  TOP w0.356: U2.15 R11.2
N138416: length 27.8
  TOP w0.356: R8.1 v1(27.55,44.31) ; v1(26.8,37.21) R11.1 ; v1(17.03,42.94) R7.1 ; R5.1 v1(17.78,47.75)
  TOP w0.457: C4.1 17.35,42.62 v1(17.03,42.94)
  SIG1 w0.356: v1(17.78,47.75) 17.03,47 v1(17.03,42.94) 22.11,42.94 23.5,44.32 27.53,44.32 v1(27.55,44.31) 27.55,37.96 v1(26.8,37.21)
N141220: length 2.3
  TOP w0.229: U3.59 28.18,27.54 R15.1
N141456: length 1.2
  TOP w0.356: R16.1 D1.2
N141460: length 1.2
  TOP w0.356: R18.1 D2.2
N141464: length 1.2
  TOP w0.356: R19.1 D3.2
N141696: length 31.6
  TOP w0.203: D3.1 2.27,22.66 2.48,22.86 7.62,22.86 v1(8.13,22.35)
  TOP w0.229: v1(27.18,20.32) 27.38,20.53 U3.61
  SIG2 w0.203: v1(8.13,22.35) 23.11,22.35 25.02,20.45 27.05,20.45 v1(27.18,20.32)
N141703: length 30.4
  TOP w0.203: D2.1 2.27,23.63 2.54,23.37 7.87,23.37 v1(8.13,23.62)
  TOP w0.229: v1(26.67,21.08) 26.98,21.4 U3.62
  SIG2 w0.203: v1(26.67,21.08) 25.4,21.08 22.86,23.62 v1(8.13,23.62)
N141710: length 29.7
  TOP w0.203: v1(7.87,24.89) 7.62,25.15 2.41,25.15 2.27,25.29 D1.1
  TOP w0.229: U3.63 26.58,22.14 v1(26.29,21.84)
  SIG2 w0.203: v1(7.87,24.89) 7.94,24.83 22.54,24.83 25.53,21.84 v1(26.29,21.84)

## Copper pours and planes (outline as drawn; the poured copper is in the pictures)
3.3V on SIG1: 48.51,54.58 48.51,1.4 1.4,1.4 1.4,54.58
GND on BOTTOM: 42.04,54.58 42.04,49.15 44.32,46.86 46.48,46.86 47.62,45.72 47.62,12.19 38.95,3.52 10.7,3.52 3.05,11.18 3.05,22.86 8.76,28.57 8.76,32.26 16.8,40.29 16.8,47.4 18.92,49.53 18.92,54.1 15.88,54.1 15.24,53.47 0.51,53.47 0.51,54.61 0.53,54.58 ; 1 cut-out
GND on SIG2: 0.41,54.58 49.63,54.58 49.63,0.41 0.41,0.41 ; 12 cut-outs
GND_EARTH on BOTTOM: 18.29,53.72 18.29,50.04 16.17,47.92 16.17,40.58 8.04,32.45 8.04,28.87 2.54,23.37 2.54,10.92 10.39,3.08 39.4,3.08 48.13,11.81 48.13,45.97 46.74,47.37 44.7,47.37 42.55,49.53 42.55,54.48 47.75,54.48 49.53,52.7 49.53,2.41 47.62,0.51 2.41,0.51 0.51,2.41 0.51,52.96 15.62,52.96 16.38,53.72
VDDC on SIG1: 21.59,17.27 21.59,15.37 26.8,10.16 30.1,10.16 32.77,7.49 35.69,7.49 36.2,8 36.2,9.53 35.31,10.41 33.02,10.41 30.86,12.57 28.19,12.57 23.24,17.53 23.24,17.65 21.97,17.65

## Text on the board
DIMENSION: FIGURE | SIZE | 8.0 | 39.37 | 65.75 | 125.0 | 129.92 | DRILL CHART: TOP to BOTTOM | ALL UNITS ARE IN MILS | TOLERANCE | +2.0/-3.0 | +3.0/-3.0 | PLATED | NON-PLATED | QTY | 146 | 57 | 2 | 4
DISPLAY_TOP: ETHIIC_
